# Altium PCB board.PcbDoc
Units mil, origin at the board's own origin, x right, y up, seen from the top; angles counter-clockwise.
Board outline 1968.5 x 1968.5 mil, 2 copper layers (Top Layer, Bottom Side); 2 components, 36 nets, 76 pads, 0 vias.
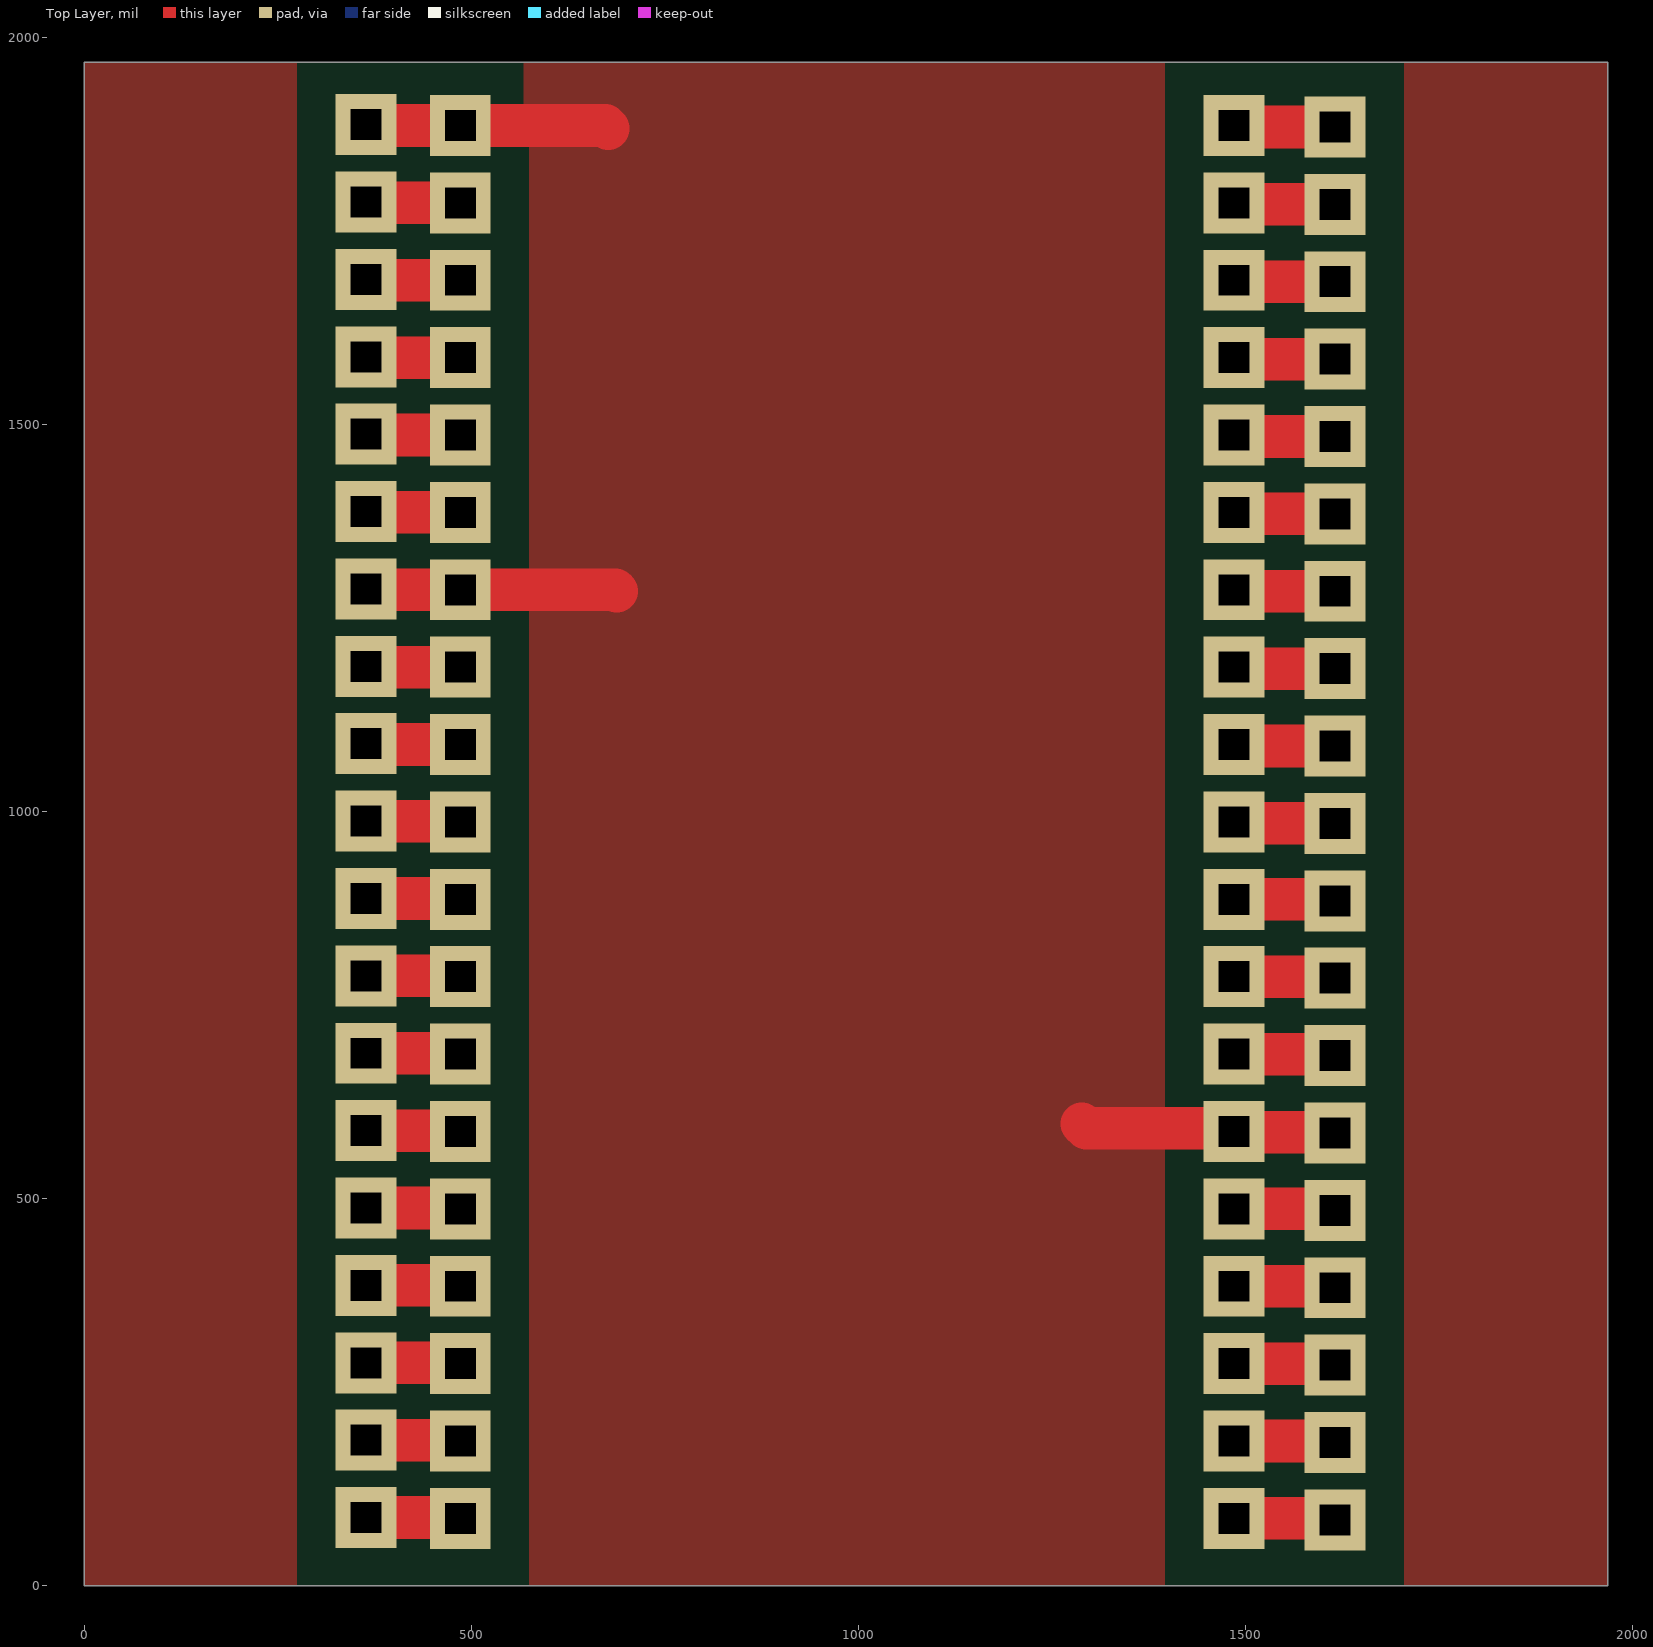
[diagram p0: Top Layer view]
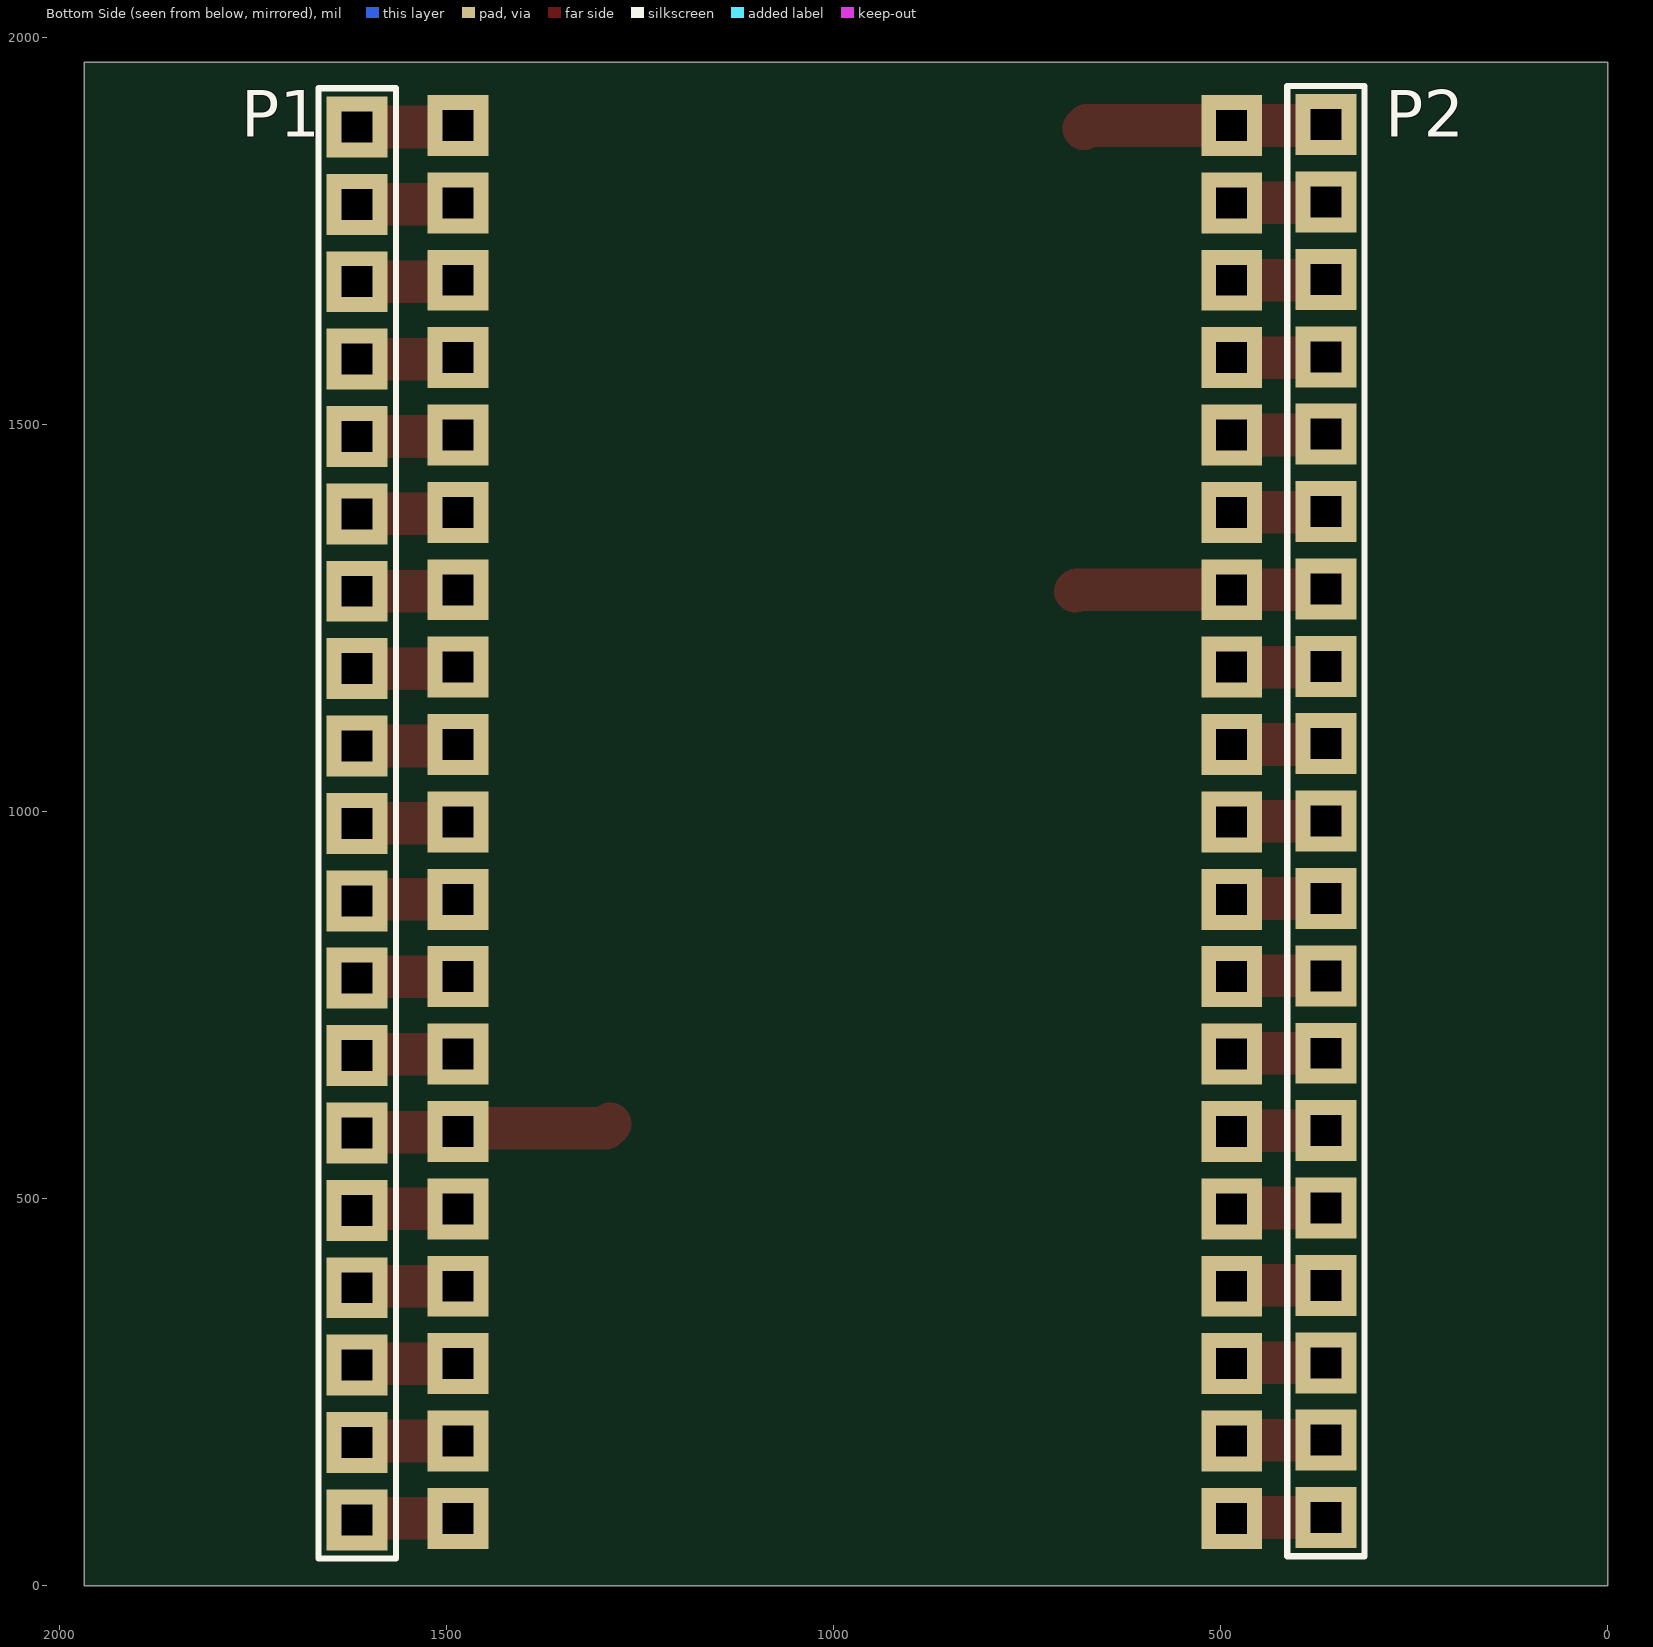
[diagram p1: Bottom Side view, seen from below]

## Layer stack, top to bottom
Top Solder: solder mask 0.4, Solder Resist, Dk 3.5
Top Layer: signal copper 1.4
Dielectric 1: dielectric 12.6, FR-4, Dk 4.8
Bottom Side: signal copper (thickness not stored)

## Board outline
0,0 0,1968.5 1968.5,1968.5 1968.5,0

## Design rules (kind name [scope] priority, off if disabled: settings)
Clearance [All] p1: gap=10 ignorepadtopadclearanceinfootprint=FALSE except(50: Arc-Poly Track-Poly SMDPad-Poly THPad-Poly Via-Poly Fill-Poly Poly-Poly Poly-Region Poly-Text Poly-Hole)
DiffPairsRouting [All] p1: maxlimit=10 minlimit=10 mostfreqgap=10 toplayer_minwidth=15 toplayer_maxwidth=15 toplayer_prefwidth=15 bottomlayer_minwidth=15 bottomlayer_maxwidth=15 bottomlayer_prefwidth=15 substack1={E86755B0-C075-474F-8B49-D2D260710BA2} toplayer_{e86755b0-c075-474f-8b49-d2d260710ba2}_minwidth=15 toplayer_{e86755b0-c075-474f-8b49-d2d260710ba2}_maxwidth=15 toplayer_{e86755b0-c075-474f-8b49-d2d260710ba2}_prefwidth=15 bottomlayer_{e86755b0-c075-474f-8b49-d2d260710ba2}_minwidth=15 bottomlayer_{e86755b0-c075-474f-8b49-d2d260710ba2}_maxwidth=15 bottomlayer_{e86755b0-c075-474f-8b49-d2d260710ba2}_prefwidth=15 maxuncoupledlength=500
PolygonConnect [All] p1: connectstyle=Relief reliefconductorwidth=10 reliefentries=4 polygonreliefangle="90 Angle" airgapwidth=10
RoutingVias [All] p1: holewidth=28 width=50 viastyle="Through Hole" minholewidth=28 minwidth=50 maxholewidth=28 maxwidth=50
SolderMaskExpansion [All] p1: expansion=4 istentingtop=FALSE
SupplyNets "Schematic Supply Nets_3" [InNet('+5V')] p1: voltage=0.000
SupplyNets "Schematic Supply Nets_1" [InNet('GND')] p2: voltage=0.000
SupplyNets "Schematic Supply Nets" [InNet('+3.3V')] p3: voltage=0.000
Width [All] p1: maxlimit=50 minlimit=25 preferedwidth=40 bottomlayer_minwidth=10 bottomlayer_maxwidth=10 bottomlayer_prefwidth=10 substack1={E86755B0-C075-474F-8B49-D2D260710BA2} toplayer_{e86755b0-c075-474f-8b49-d2d260710ba2}_minwidth=10 toplayer_{e86755b0-c075-474f-8b49-d2d260710ba2}_maxwidth=140 toplayer_{e86755b0-c075-474f-8b49-d2d260710ba2}_prefwidth=10 bottomlayer_{e86755b0-c075-474f-8b49-d2d260710ba2}_minwidth=10 bottomlayer_{e86755b0-c075-474f-8b49-d2d260710ba2}_maxwidth=10 bottomlayer_{e86755b0-c075-474f-8b49-d2d260710ba2}_prefwidth=10 minimp=50.000000 maximp=50.000000 favimp=50.000000
29 further rules are at their usual default settings.

## Components (designator, comment, footprint, x,y, rotation, side; value= is the part's Value field where it differs from the comment)
P1 "Header 19" HDR1X19#1 1616,85 r90 bottom
P2 "Header 19" HDR1X19#2 364,1888 r270 bottom

## Footprints (in the part's own frame and the unit in brackets; to place one, negate y for a bottom-side part, rotate by r counter-clockwise, add the part's x,y. Pads: shape width x height; smd on the part's side, far side on the other; paste and mask are expansions set on the pad)
HDR1X19#1 [mm] "Connector; Header; 19 Position"
  rect 2x2 hole 1 square: 1(0,0) 2(2.54,0) 3(5.08,0) 4(7.62,0) 5(10.16,0) 6(12.7,0) 7(15.24,0) 8(17.78,0) 9(20.32,0) 10(22.86,0) 11(25.4,0) 12(27.94,0) 13(30.48,0) 14(33.02,0) 16(38.1,0) 17(40.64,0) 18(43.18,0) 19(45.72,0) ""(35.56,0)
  silkscreen extent -1.27,-1.27 46.99,1.27
HDR1X19#2 [mm] "Connector; Header; 19 Position"
  rect 2x2 hole 1 square: 1(0,0) 2(2.54,0) 3(5.08,0) 4(7.62,0) 5(10.16,0) 6(12.7,0) 7(15.24,0) 8(17.78,0) 9(20.32,0) 10(22.86,0) 11(25.4,0) 12(27.94,0) 13(30.48,0) 14(33.02,0) 15(35.56,0) 16(38.1,0) 17(40.64,0) 18(43.18,0) 19(45.72,0)
  silkscreen extent -1.27,-1.27 46.99,1.27

## Part data
P1 P2: "Header, 19-Pin", LatestRevisionDate=17-Jul-2002, LatestRevisionNote="Re-released for DXP Platform.", Publisher="Altium Limited"

## Free pads (board coordinates)
  rect 78.74x78.74 hole 39.37 square: J2-1(1485.8,1886.91) J2-2(1485.8,1786.91) J2-3(1485.8,1686.91) J2-4(1485.8,1586.91) J2-5(1485.8,1486.91) J2-6(1485.8,1386.91) J2-7(1485.8,1286.91) J2-8(1485.8,1186.91) J2-9(1485.8,1086.91) J2-10(1485.8,986.91) J2-11(1485.8,886.91) J2-12(1485.8,786.91) J2-13(1485.8,686.91) J2-14(1485.8,586.91) J2-15(1485.8,486.91) J2-16(1485.8,386.91) J2-17(1485.8,286.91) J2-18(1485.8,186.91) J2-19(1485.8,86.91) J3-1(485.8,1886.91) J3-2(485.8,1786.91) J3-3(485.8,1686.91) J3-4(485.8,1586.91) J3-5(485.8,1486.91) J3-6(485.8,1386.91) J3-7(485.8,1286.91) J3-8(485.8,1186.91) J3-9(485.8,1086.91) J3-10(485.8,986.91) J3-11(485.8,886.91) J3-12(485.8,786.91) J3-13(485.8,686.91) J3-14(485.8,586.91) J3-15(485.8,486.91) J3-16(485.8,386.91) J3-17(485.8,286.91) J3-18(485.8,186.91) J3-19(485.8,86.91)

## Nets (pads, with @x,y where several pads share a name; then routed paths per layer and width w, separated by ;. In a path a pad name is that pad's centre, name@x,y a point inside that pad or via, vN(x,y) a via of type N, cw(c..) or ccw(c..) an arc to the next point about the centre after c; other vN are vias at no path point)
+3.3V: P1.19 pad.J2-1 | length 131
  Top Layer w55.12: pad.J2-1 1487.72,1885 P1.19
+5V: P1.1 pad.J2-19 | length 131
  Top Layer w55.12: pad.J2-19 1614.09,86.91 P1.1
GND: P1.6 P2.1 P2.7 pad.J2-14 pad.J3-1 pad.J3-7 | length 970.9
  Top Layer w55.12: P2.7 365.09,1286.91 pad.J3-7 686.09,1286.91 688,1285 ; P2.1 365.09,1886.91 pad.J3-1 673.09,1886.91 677,1883 ; 1289,597 1294.99,591.01 1481.71,591.01 pad.J2-14 ; pad.J2-14@1486.76,585.96 1615.04,585.96 P1.6
NetP1_2: P1.2 pad.J2-18 | length 131
  Top Layer w55.12: pad.J2-18 1614.09,186.91 P1.2
NetP1_3: P1.3 pad.J2-17 | length 131
  Top Layer w55.12: pad.J2-17 1614.09,286.91 P1.3
NetP1_4: P1.4 pad.J2-16 | length 131
  Top Layer w55.12: pad.J2-16 1614.09,386.91 P1.4
NetP1_5: P1.5 pad.J2-15 | length 131
  Top Layer w55.12: pad.J2-15 1614.09,486.91 P1.5
NetP1_7: P1.7 pad.J2-13 | length 131
  Top Layer w55.12: pad.J2-13 1614.09,686.91 P1.7
NetP1_8: P1.8 pad.J2-12 | length 131
  Top Layer w55.12: pad.J2-12 1614.09,786.91 P1.8
NetP1_9: P1.9 pad.J2-11 | length 131
  Top Layer w55.12: pad.J2-11 1614.09,886.91 P1.9
NetP1_10: P1.10 pad.J2-10 | length 131
  Top Layer w55.12: pad.J2-10 1487.72,985 P1.10
NetP1_11: P1.11 pad.J2-9 | length 131
  Top Layer w55.12: pad.J2-9 1487.72,1085 P1.11
NetP1_12: P1.12 pad.J2-8 | length 131
  Top Layer w55.12: pad.J2-8 1487.72,1185 P1.12
NetP1_13: P1.13 pad.J2-7 | length 131
  Top Layer w55.12: pad.J2-7 1487.72,1285 P1.13
NetP1_14: P1.14 pad.J2-6 | length 131
  Top Layer w55.12: pad.J2-6 1487.72,1385 P1.14
NetP1_15: P1. pad.J2-5 | length 131
  Top Layer w55.12: pad.J2-5 1487.72,1485 P1.
NetP1_16: P1.16 pad.J2-4 | length 131
  Top Layer w55.12: pad.J2-4 1487.72,1585 P1.16
NetP1_17: P1.17 pad.J2-3 | length 131
  Top Layer w55.12: pad.J2-3 1487.72,1685 P1.17
NetP1_18: P1.18 pad.J2-2 | length 131
  Top Layer w55.12: pad.J2-2 1487.72,1785 P1.18
NetP2_2: P2.2 pad.J3-2 | length 128.4
  Top Layer w55.12: P2.2 365.09,1786.91 pad.J3-2 pad.J3-2@481.49,1782.6
NetP2_3: P2.3 pad.J3-3 | length 122.3
  Top Layer w55.12: P2.3 365.09,1686.91 pad.J3-3
NetP2_4: P2.4 pad.J3-4 | length 122.3
  Top Layer w55.12: P2.4 365.09,1586.91 pad.J3-4
NetP2_5: P2.5 pad.J3-5 | length 122.3
  Top Layer w55.12: P2.5 365.09,1486.91 pad.J3-5
NetP2_6: P2.6 pad.J3-6 | length 122.3
  Top Layer w55.12: P2.6 365.09,1386.91 pad.J3-6
NetP2_8: P2.8 pad.J3-8 | length 122.3
  Top Layer w55.12: P2.8 365.09,1186.91 pad.J3-8
NetP2_9: P2.9 pad.J3-9 | length 122.3
  Top Layer w55.12: P2.9 365.09,1086.91 pad.J3-9
NetP2_10: P2.10 pad.J3-10 | length 122.4
  Top Layer w55.12: P2.10 484.72,988 pad.J3-10 pad.J3-10@485.72,987
NetP2_11: P2.11 pad.J3-11 | length 122.3
  Top Layer w55.12: P2.11 484.72,888 pad.J3-11
NetP2_12: P2.12 pad.J3-12 | length 122.3
  Top Layer w55.12: P2.12 484.72,788 pad.J3-12
NetP2_13: P2.13 pad.J3-13 | length 122.3
  Top Layer w55.12: P2.13 484.72,688 pad.J3-13
NetP2_14: P2.14 pad.J3-14 | length 122.3
  Top Layer w55.12: P2.14 484.72,588 pad.J3-14
NetP2_15: P2.15 pad.J3-15 | length 122.3
  Top Layer w55.12: P2.15 484.72,488 pad.J3-15
NetP2_16: P2.16 pad.J3-16 | length 122.3
  Top Layer w55.12: P2.16 484.72,388 pad.J3-16
NetP2_17: P2.17 pad.J3-17 | length 122.3
  Top Layer w55.12: P2.17 484.72,288 pad.J3-17
NetP2_18: P2.18 pad.J3-18 | length 122.3
  Top Layer w55.12: P2.18 484.72,188 pad.J3-18
NetP2_19: P2.19 pad.J3-19 | length 122.3
  Top Layer w55.12: P2.19 484.72,88 pad.J3-19

## Polygon pours and split planes (outlines as drawn)
no net on Top Layer "NONET_L-01_P-001" (solid, pour order 0): 0,0 0,1968.5 281,1968.5 281,0
GND on Top Layer "NONET_L-01_P-001" (solid, pour order 2): 568,0 568,1968.5 1405,1968.5 1405,0
no net on Top Layer "NONET_L-01_P-001" (solid, pour order 1): 1698,0 1698,1968.5 1968.5,1968.5 1968.5,0

## Silkscreen, mask and mechanical layers (free items; w line width, h text height)
Mechanical 13:
  lines w5: 436.59,36.13 436.59,2177.86 1534,2177.86 1534,36.13 436.59,36.13
Mechanical 15:
  lines w1.97: 426.75,26.28 426.75,2187.7 1544.86,2187.7 1544.86,26.28 426.75,26.28